# Altium PCB SV06.PcbDoc (part 3 of 3)
Units mil, origin at the board's own origin, x right, y up, seen from the top; angles counter-clockwise.
Board outline 3960.63 x 2763.78 mil, 2 copper layers (Top, Bottom), stack 12.7 mil thick; 211 components, 173 nets, 726 pads, 644 vias.
Unrouted connection lines stored in the file: 411.
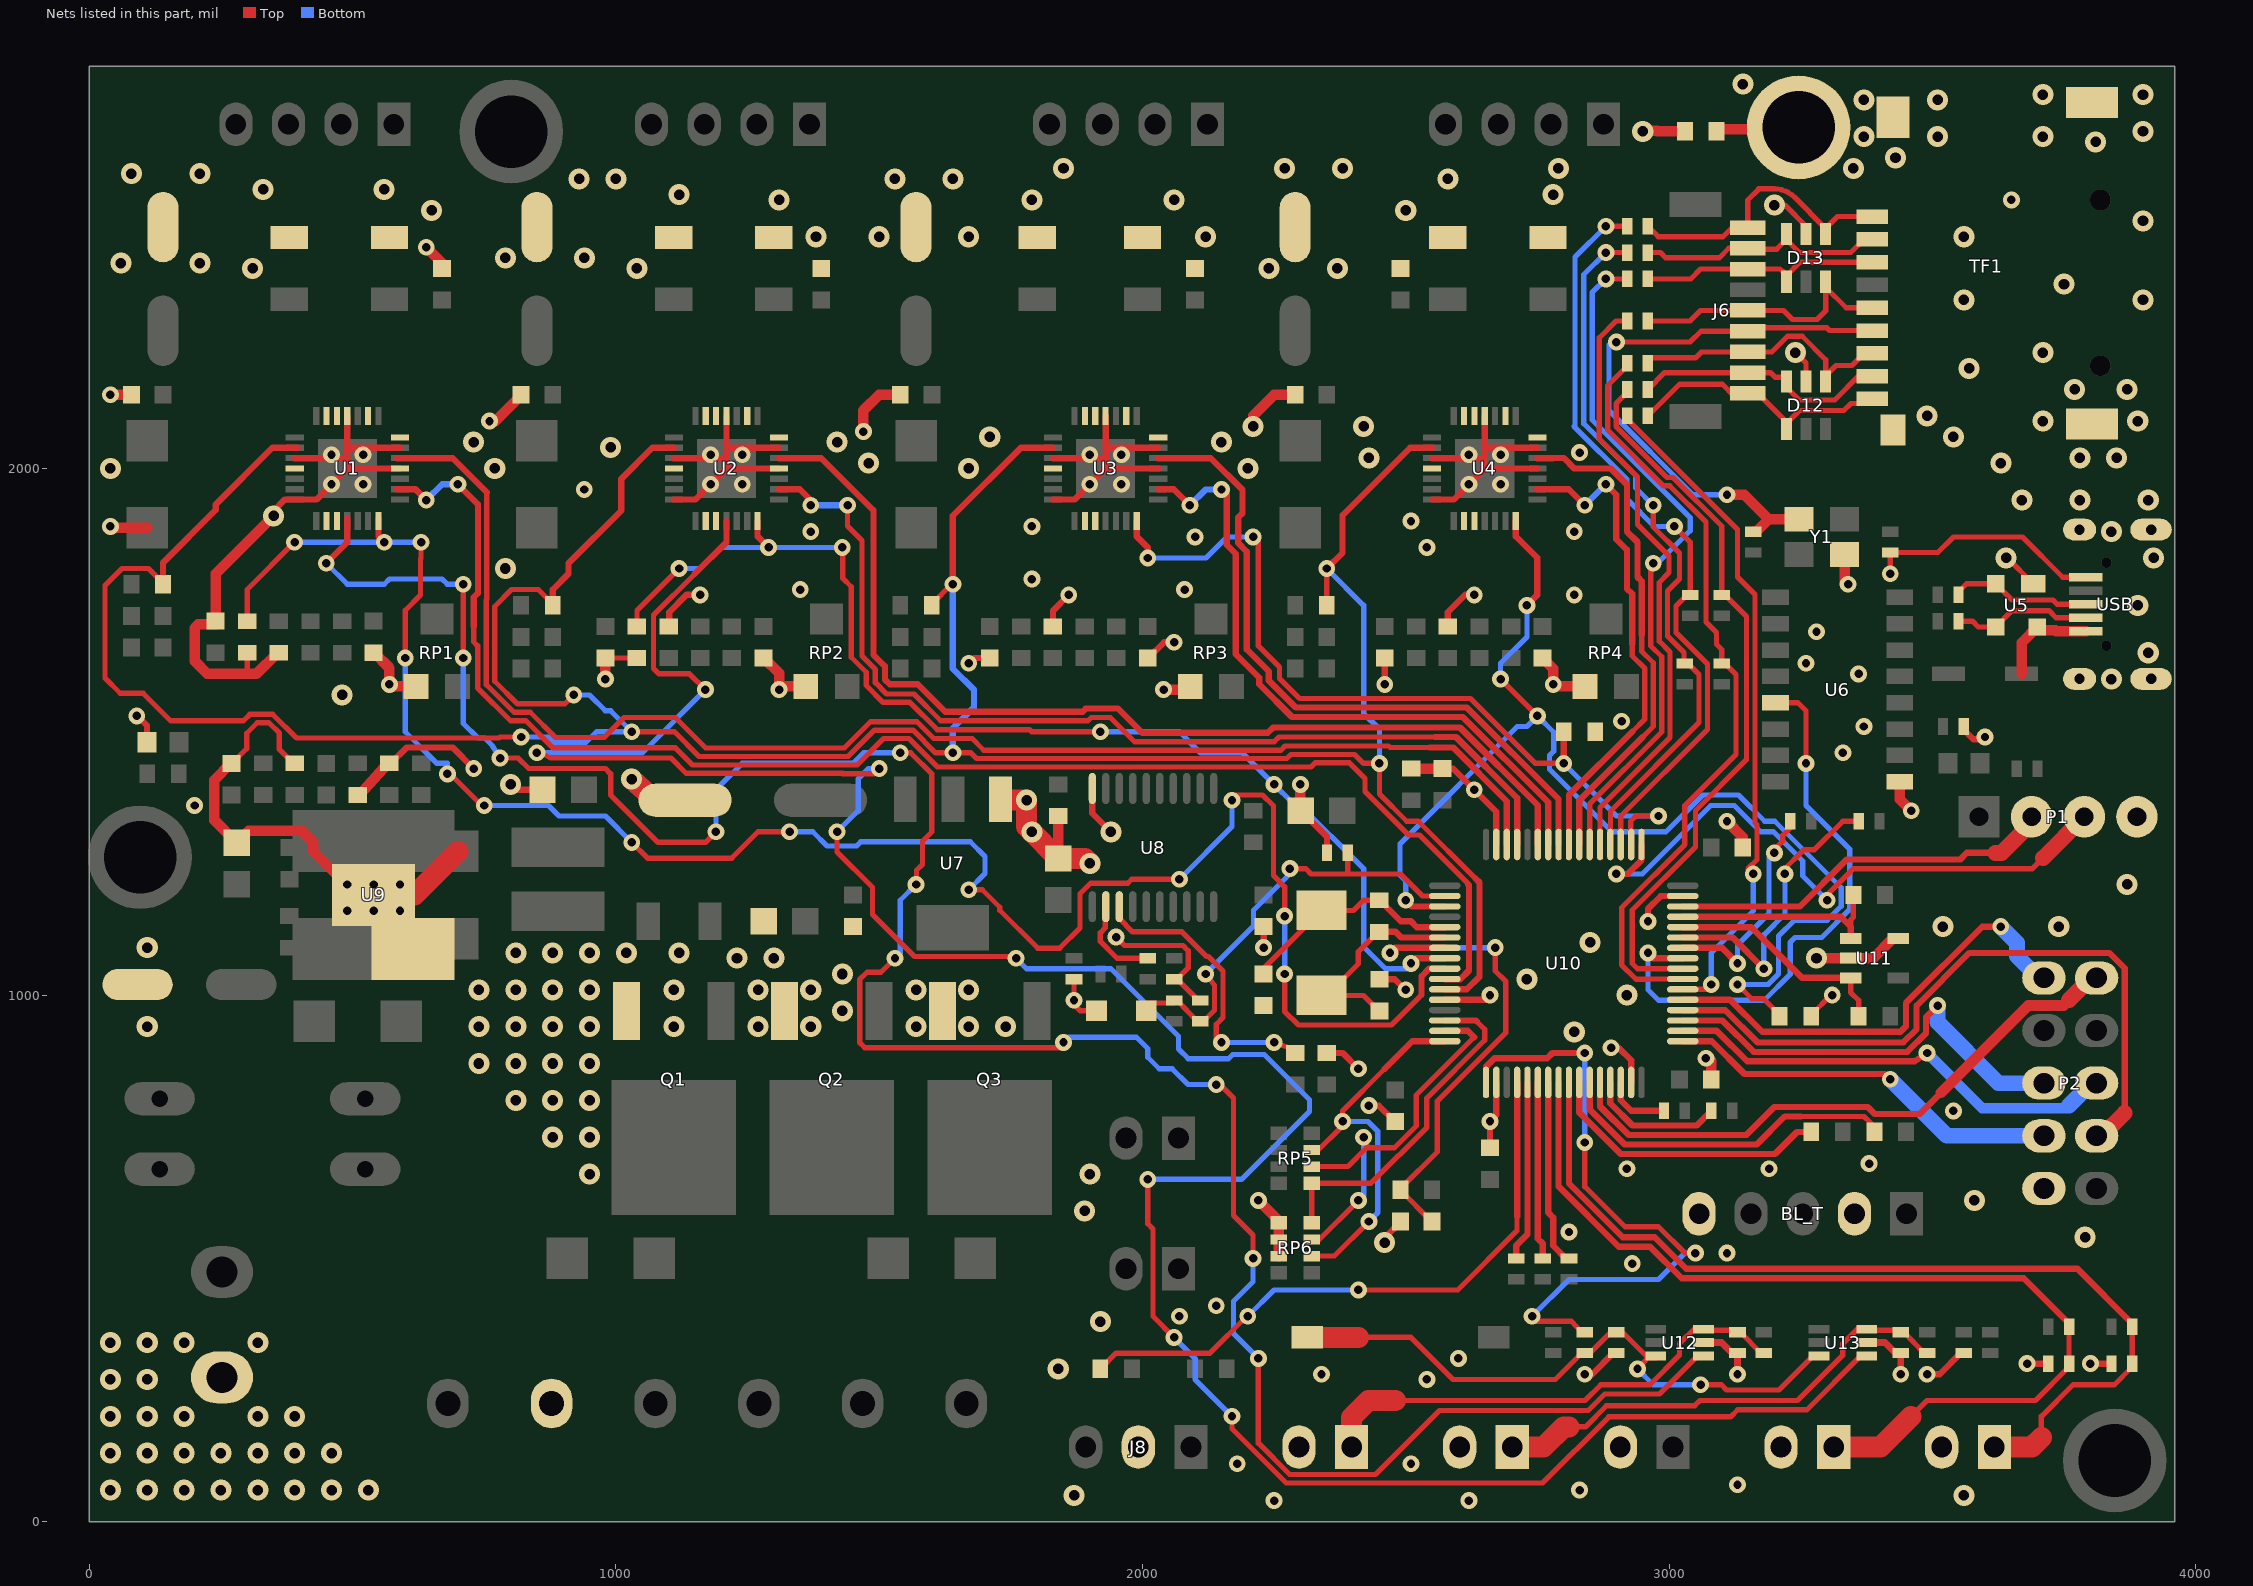
[diagram p3: the nets of this part, all layers, seen from the top]

## Via types
v1: diameter 32, hole 16, Top to Bottom, 363 vias
v2: diameter 40, hole 20, Top to Bottom, 281 vias

## Nets (pads, with @x,y where several pads share a name; then routed paths per layer and width w, separated by ;. In a path a pad name is that pad's centre, name@x,y a point inside that pad or via, vN(x,y) a via of type N, cw(c..) or ccw(c..) an arc to the next point about the centre after c; other vN are vias at no path point) (continued)
GND: BL_T.2 BL_T.5 C1.1 C2.1 C3.2 C4.2 C5.2 C6.2 C7.2 C8.2 C9.2 C10.2 C11.1 C12.1 C13.1 C14.2 C15.2 C21.2 C22.2 C24.2 C25.2 C27.2 C28.2 C30.2 C31.2 C32.2 C34.2 C36.1 C38.2 C39.1 C40.1 C41.1 C42.2 C44.2 C46.2 C47.2 C48.2 C49.2 C50.2 C51.1 C52.1 C53.1 C54.1 C55.1 C56.1 C57.1 C58.2 C59.2 C60.2 D6.1 D14.2 FAN.2 J6.6 J8.2 J9.2 J10.2 J11.2 P1.4 P2.9 P3.1 Q1.3 Q2.3 Q3.3 R9.1 R10.2 R14.2 R18.2 R22.2 R28.1 R29.1 R30.1 R32.2 R33.2 R40.2 R42.2 R46.2 R53.2 R55.2 R60.2 R61.2 R68.1 R70.2 RP1.1 RP2.1 RP3.1 RP4.1 RP6.1 RP6.2 RP6.3 S1.1 S2.1 S3.1 S4.1 S5.1 S6.1 S7.1 S8.1 TB.2 TF1.6 TH.2 U1.3 U1.7 U1.18 U1.20 U1.25 U2.3 U2.7 U2.18 U2.20 U2.25 U3.3 U3.7 U3.18 U3.20 U3.25 U4.3 U4.7 U4.18 U4.20 U4.25 U6.1 U7.1 U8.10 U9.0 U9.4 U10.12 U10.18 U10.31 U10.47 U10.63 U11.2 U11.5 U12.2 U13.2 USB.1 Y1.2 Y1.4 | length 10524.1
  Top w10: C32.2@270,1440 271,1440 298.89,1467.89 298.89,1497.07 318.82,1517 341.18,1517 360.86,1497.32 360.86,1466.64 387.5,1440 R28.1@390,1440 ; 300,1610 R53.2@300,1650 ; C24.2@980,1640 R55.2@1040,1640 ; R40.2@1870,1030.32 v1(1870,990) 1870,982.07 1882.07,970 1910,970 D14.2@1912.76,970 ; v1(1950,1110) 1965.89,1094.11 2076.73,1094.11 2086.75,1084.09 2086.75,1051.16 R42.2@2065.91,1030.32 ; R42.2@2060,1030.32 R42.2@2065.91,1030.32 ; R68.1@2110,989.69 2106.54,989.69 R42.2@2065.91,1030.32 ; v1(2900,2240) 3040,2240 3060.63,2260.63 3158.07,2260.63 J6.6@3149.51,2260.64 3138.9,2261.81 3143.62,2266.53 3144.09,2267 3299.79,2267 3304.98,2261.81 TF1.6@3385.83,2261.81 ; v2@2949.95,2641.2 2950,2641.15 v2(2950,2640) ; R61.2@3270,960 3270,962.5 3307.5,1000 v1(3310,1000) ; v1(3420,1800) v1@3420,1809.73 ; v1@3420,1809.74 C13.1@3420,1840.31 3510.31,1840.31 3540,1870 3671.02,1870 3747.72,1793.31 USB.1@3791.34,1793.31
  Top w12: v1(90,1530) 90.98,1530 109.69,1511.29 D6.1@109.69,1480 ; v2(350,1910) 350,1920 371.03,1941.03 395.51,1941.03 395.51,1940.94 ; 390.1,1940.94 395.51,1940.94 ; 390.1,2019.68 490,2019.68 ; v1@460,1974 v1@461.6,1972.4 ; U1.18@490,2099.9 490,2039.37 ; R30.1@570,1440 572.5,1440 602.5,1470 690,1470 v1(730,1430) ; 589.9,2000 490,2000 ; 589.9,2039.37 490,2039.37 ; v2(800,1400) 810,1390 C46.2@860.63,1390 ; R14.2@1100,1700 1101.04,1700 1101.04,1727 1134.04,1760 v1(1160,1760) ; 1110.1,1940.94 1150.94,1940.94 v1(1180,1970) 1210,2000 ; 1110.1,2019.68 1210,2019.68 ; U2.18@1210,2099.9 1210,2039.37 ; 1309.9,2000 1210,2000 ; 1309.9,2039.37 1210,2039.37 ; v1(1670,1630) 1680,1640 C27.2@1710,1640 ; R18.2@1830,1700 1830,1730 v1(1860,1760) ; 1830.1,1940.94 1870.94,1940.94 v1(1900,1970) 1930,2000 ; 1830.1,2019.68 1930,2019.68 ; U8.10@1904.84,1392.2 1904.84,1345.16 v2(1940,1310) ; U3.18@1930,2099.9 1930,2039.37 ; C28.2@2010,1640 2011,1640 2041,1670 v1(2060,1670) ; 2029.9,2000 1930,2000 ; 2029.9,2039.37 1930,2039.37 ; v1(2230,1090) C47.2@2230,1130 ; C40.1@2300.63,1350 2350.32,1300.31 C34.2@2350.32,1270 ; R46.2@2350,890 2380,890 v1(2410,860) ; v1(2430,790) 2449,790 2479,760 C52.1@2480,760 ; C50.2@2450,1030 2479,1030 2500,1009 v1(2500,1010) ; v2(2460,530) 2460,539 2490,569 C54.1@2490,570 ; v1(2460,1590) C30.2@2460,1640 ; 2550.1,1940.94 2590.94,1940.94 v1(2620,1970) 2650,2000 ; 2550.1,2019.68 2650,2019.68 ; C36.1@2570,1430 2590,1430 v1(2630,1390) 2672.05,1347.95 U10.63@2672.05,1285.91 ; U10.12@2574.09,991.1 2651.1,991.1 v1(2660,1000) ; R22.2@2580,1700 2580,1727 2613,1760 v1(2630,1760) ; U4.18@2650,2099.9 2650,2039.37 ; C53.1@2660,710 v1(2660,760) 2672.05,772.05 U10.18@2672.05,834.09 ; 2749.9,2000 2650,2000 ; 2749.9,2039.37 2650,2039.37 ; v1(2840,280) 2853.78,280 2894.09,320.31 R9.1@2900,320.31 ; v1(2890,900) 2904.05,900 2927.95,876.09 U10.31@2927.95,834.09 ; v1(2960,1140) 2960,1164.05 2983.91,1187.95 U10.47@3025.91,1187.95 ; v1(3440,280) C56.1@3440,320.31 ; v1(3490,280) 3513.78,280 3554.1,320.31 C57.1@3560,320.31 ; C15.2@3559.68,1510 3559.68,1504.09 3578.01,1485.76 3595.76,1485.76 v1(3600,1490) ; v1(3680,300) C58.2@3720.32,300 ; v1(3800,300) C59.2@3840.32,300 ; 395.51,1940.94 431.45,1940.94 490.15,1999.64 490,2000 ; 490,2000 490,2019.68 ; 490,2019.68 490,2039.37 ; 1210,2000 1210,2019.68 ; 1210,2019.68 1210,2039.37 ; 1930,2000 1930,2019.68 ; 1930,2019.68 1930,2039.37 ; 2650,2000 2650,2019.68 ; 2650,2019.68 2650,2039.37
  Top w13: U12.2@3065.27,340 3100,340 3119.69,320.31 3120.31,320.31 C55.1@3130,320.31 3130,290 v1(3130,280) ; U13.2@3375.27,340 3410,340 3429.69,320.31 C56.1@3440,320.31
  Top w20: v1(40,1890) 42.68,1887.32 110,1887.32 ; v1(40,2140) C9.2@80,2140 ; C32.2@270,1440 269,1440 237,1408 237,1332.37 C42.2@280,1289.37 302.63,1312 403.63,1312 425.09,1290.53 425.09,1273.25 489.17,1209.17 508.35,1190 U9.0@540,1190 580,1150 615,1115 U9.4@615,1087.64 ; v2(350,1910) 240,1800 C21.2@240,1710 240,1704 207,1704 200,1697 200,1634.37 224.37,1610 300,1610 317.5,1610 357.5,1650 R10.2@360,1650 ; R29.1@510,1380 513,1380 567,1440 R30.1@570,1440 ; C22.2@540,1650 541,1650 570,1621 v1(570,1590) 572.2,1590 576.17,1586.03 RP1.1@620.63,1586.03 ; v1(640,2420) 670,2390 C1.1@670,2380 ; v1(760,2090) 771,2090 820,2139 C10.2@820,2140 ; v1(980,1600) C24.2@980,1640 ; C25.2@1280,1640 1281,1640 1310,1611 v1@1310,1582.2 ; v1(1310,1580) v1@1310,1582.2 ; RP2.1@1360.63,1586.03 1313.83,1586.03 v1@1310,1582.2 ; v1(1470,2070) 1470,2110 1500,2140 C11.1@1540,2140 ; U7.1@1730.55,1372 1778,1372 v2(1780,1370) ; C44.2@1840,1259.37 R32.2@1840,1340 ; v1(2040,1580) 2090.63,1580 RP3.1@2090.63,1586.03 ; v2(2210,2080) 2210,2100 2250,2140 C12.1@2290,2140 ; v1(2220,610) 2258.51,571.49 RP6.1@2258.51,567.24 RP6.2@2258.5,535.75 RP6.3@2258.5,504.25 ; v1(2300,1400) 2300,1350 C40.1@2300.63,1350 ; R33.2@2510,1430 C36.1@2570,1430 ; C31.2@2760,1640 2780,1620 v1@2780,1590.27 ; v1(2780,1590) v1@2780,1590.27 ; RP4.1@2840.63,1586.03 2786.17,1586.03 2780.96,1591.24 v1@2780,1590.27 ; v2@2949.95,2641.2 2976.37,2641.2 2977.57,2640 R70.2@3030,2640 ; v1(3070,880) 3075,880 3080,875 C51.1@3080,840 ; v1(3110,1330) 3140,1300 C41.1@3140,1280 ; v1(3110,1950) 3143.16,1950 3189.69,1903.47 ; C14.2@3160,1879.68 3165.91,1879.68 3189.69,1903.47 ; Y1.4@3246.69,1903.47 3189.69,1903.47 ; v2(3280,1070) U11.2@3344.82,1070 3387.68,1070 3425.08,1107.4 U11.5@3435.18,1107.4 ; Y1.2@3333.31,1836.53 3333.31,1786.69 v1(3340,1780) ; U6.1@3438.11,1405 3438.11,1371.89 v1(3460,1350)
  Top w40: U9.0@540,1190 617.32,1190 700,1272.68 ; v2(1030,1410) 1074.28,1370 C60.2@1131.37,1370 ; U7.1@1730.55,1372 1730.55,1370 v2(1780,1370) 1780,1320 v2(1790,1310) 1835,1264.37 1835,1259.37 C44.2@1840,1259.37 1891,1259.37 1900,1250.37 v2(1900,1250)
  Bottom w10: v1(2900,2240) 2891.1,2240 2886,2234.9 2886,2110 3046,1950 v1(3110,1950)
  other v1: 2250,40 2620,40 2830,60 3130,70 2180,110 2510,110 2540,270 2340,280 2600,310 2070,390 2140,410 2930,490 3110,510 2810,550 2920,670 3190,670 3380,680 3540,780 490,1160 540,1160 590,1160 490,1210 540,1210 590,1210 200,1360 3330,1460 3370,1510 2910,1520 3360,1610 3260,1630 3280,1690 2820,1760 1350,1770 2080,1770 1790,1790 2540,1850 2100,1870 1370,1880 2820,1880 1790,1890 2510,1900 940,1960 460,1970 520,1970 1240,1970 1960,1970 2680,1970 460,2026 520,2026 1180,2026 1240,2026 1900,2026 1960,2026 2620,2026 2680,2026 2830,2030
  other v2: 1870,50 3560,50 40,60 110,60 180,60 250,60 320,60 390,60 460,60 530,60 40,130 110,130 180,130 250,130 320,130 390,130 460,130 40,200 110,200 180,200 320,200 390,200 40,270 110,270 1840,290 40,340 110,340 180,340 320,340 1920,380 3790,540 1890,590 3580,610 950,660 1900,660 880,730 950,730 810,800 880,800 950,800 740,870 810,870 880,870 950,870 2820,930 110,940 740,940 810,940 880,940 950,940 1110,940 1270,940 1370,940 1570,940 1670,940 1740,940 1430,970 2920,1000 740,1010 810,1010 880,1010 950,1010 1110,1010 1270,1010 1370,1010 1570,1010 1670,1010 2730,1030 1430,1040 1230,1070 1300,1070 810,1080 880,1080 950,1080 1020,1080 1120,1080 110,1090 2850,1100 3520,1130 3740,1130 3870,1210 480,1570 790,1810 40,2000 770,2000 1670,2000 2200,2000 1480,2010 2430,2020 990,2040 730,2050 1420,2050 2150,2050 1710,2060 2420,2080 310,2380 1040,2380 2240,2380 2370,2380 60,2390 210,2390 790,2400 940,2400 1380,2440 1500,2440 1670,2440 2120,2440 650,2490 2500,2490 1310,2510 1790,2510 2060,2510 1120,2520 2780,2520 330,2530 560,2530 930,2550 1000,2550 1530,2550 1640,2550 2580,2550 80,2560 210,2560 1850,2570 2270,2570 2380,2570 2790,2570
HEATER1_5V: R43.1 U8.12 | length 174.4
  Top w10: U8.12@1930.43,1167.8 1929.08,1167.8 1929.08,1127.17 1920,1118.09 1920,1101.82 1952.13,1069.69 R43.1@2010,1069.69
K_FAN_5V: R45.1 U8.13 | length 563.1
  Top w10: U8.13@1956.02,1167.8 1956.02,1145.16 1981.18,1120 2074.81,1120 2121.81,1073 2125.18,1073 2152.75,1045.44 2152.75,957.14 2140,944.39 2140,910 v1(2150,910) ; v1(2250,910) 2277.5,900 2290,900 R45.1@2290,890
  Bottom w10: v1(2150,910) v1(2250,910)
OSC_IN: C49.1 R39.2 U10.5 Y2.2 | length 444
  Top w10: C49.1@2230,1040 2230,1050.71 Y2.2@2340,1160.71 ; R39.2@2450,1180 2420,1180 2400.71,1160.71 Y2.2@2340.62,1160.71 ; Y2.2@2340,1160.71 2340,1160 2340.35,1160.4 Y2.2@2340.62,1160.71 ; Y2.2@2340,1160.71 2344.69,1165.4 Y2.2@2340.62,1160.71 ; Y2.2@2340,1160.71 Y2.2@2340.62,1160.71
  Top w12: R39.2@2450,1180 2450.4,1180 2490.4,1140 2510,1140 2521.1,1128.9 U10.5@2574.09,1128.9
OSC_OUT: C50.1 R39.1 U10.6 Y2.1 | length 414.4
  Top w10: Y2.1@2340,999.29 Y2.1@2349.84,999.29 ; C50.1@2450,970 2449,970 2419.71,999.29 Y2.1@2349.84,999.29 ; R39.1@2450,1120 2447.5,1120 2410,1082.5 2410,1059.45 Y2.1@2349.84,999.29
  Top w12: R39.1@2450,1120 2480.4,1120 2491.19,1109.21 U10.6@2574.09,1109.21
PA0_K_FAN1: RP5.1 RP6.8 U10.14 | length 652.5
  Top w10: 2321.49,605 RP5.1@2321.49,642.76 2433.94,642.76 2540,748.82 2540,804.29 2650,914.29 2650,934.87 2634.87,950 ; RP6.8@2321.5,567.24 2321.5,604.99
  Top w12: U10.14@2574.09,951.73 2633.14,951.73 2634.87,950
PA1_HEATER1: RP5.2 RP6.7 U10.15 | length 776
  Top w10: RP6.7@2321.5,535.75 2321.5,532.38 2332.38,532.38 v1(2410,610) ; RP5.2@2321.5,674.25 2390,674.25 2425.75,710 ; v1(2420,730) 2425.75,724.25 2425.75,710 ; 2630,920 2520,810 2520,751.44 2478.56,710 2425.75,710
  Top w12: U10.15@2574.09,932.05 2617.95,932.05 2630,920
  Bottom w10: v1(2410,610) 2420,620 v1(2420,730)
PA2_BED: RP5.3 RP6.6 U10.16 | length 748.3
  Top w10: RP6.6@2321.5,504.25 2364.25,504.25 v1(2430,570) ; RP5.3@2321.5,705.75 2321.5,702.38 2330.77,702.38 2380,751.61 v1(2380,760) 2380,780 2460,860
  Top w12: 2460,860 2512.36,912.36 U10.16@2574.09,912.36
  Bottom w10: v1(2380,760) 2428.18,760 2447,741.18 2447,587 v1(2430,570)
PA3_NONE_LMT: R62.2 U10.17 | length 1222.3
  Top w10: v1(2740,390) 2740.52,380.52 2814.77,380.52 2833.63,359.68 R62.2@2840,359.68 ; v1(2840,720) 2840,636.16 2916.16,560 2980,560 3030,510 v1(3050,510)
  Top w12: U10.17@2652.36,834.09 2652.36,863.87 2668.5,880 2768.63,880 2778.63,890 v1(2840,890)
  Bottom w10: v1(2740,390) 2810,460 2980,460 3030,510 v1(3050,510) ; v1(2840,720) v1(2840,890)
PA4_PLA_DET: R58.1 U10.20 | length 1182.4
  Top w10: R58.1@1920,290 1950,320 2128.18,320 2199.09,390.91 v1(2200,390) ; v1(2410,440) 2598.79,440 2711.42,552.63 2711.42,580
  Top w12: 2711.42,580 U10.20@2711.42,834.09
  Bottom w10: v1(2200,390) 2250,440 v1(2410,440)
PA5_LIMIT_X: R13.2 U10.21 | length 343.2
  Top w12: R13.2@2710,499.68 2710,524.35 2731.1,545.45 U10.21@2731.1,834.09
PA6_LIMIT_Y: R51.2 U10.22 | length 338.2
  Top w12: U10.22@2750.79,834.09 2750.79,537.45 2760,528.23 R51.2@2760,499.68
PA7_LIMIT_Z: R64.1 U10.23 | length 354.2
  Top w12: U10.23@2770.47,834.09 2770.47,586.98 2780,577.45 2780,523.78 2804.09,499.69 R64.1@2810,499.69
PA8_DTR: U6.13 U10.41 | length 1114.9
  Top w10: U6.13@3201.89,1555 3245,1555 3260,1540 v1(3260,1440)
  Top w12: v1(2960,1080) 2970.16,1069.84 U10.41@3025.91,1069.84
  Bottom w10: v1(2960,1080) 2960,1010 2980,990 3180.81,990 3230,1039.19 3230,1100 3239.19,1109.19 3290,1109.19 3343,1162.19 3343,1277 3260,1360 v1(3260,1440)
PA9_MCU_USART_TX_3V3: R34.2 U10.42 | length 435
  Top w10: v1(3200,1270) 3196.8,1273.2 3215.9,1292.29 3215.9,1303.28 3233.52,1320.9 3233.52,1330 R34.2@3230.32,1330
  Top w12: U10.42@3025.91,1089.53 3100.47,1089.53 v1(3130,1060)
  Bottom w10: v1(3130,1060) 3130,1094.8 3190,1154.8 3190,1260 v1(3200,1270)
PA10_MCU_USART_RX_3V3: R35.2 U10.43 | length 566.9
  Top w10: v1(3220,1230) 3215,1235 3256.17,1276.17 3276.17,1276.17 3330,1330 R35.2@3360.32,1330
  Top w12: U10.43@3025.91,1109.21 3120.79,1109.21 v1(3180,1050)
  Bottom w10: v1(3180,1050) 3180,1114.32 3220,1154.32 v1(3220,1230)
PA11_I2C_SDA: R44.2 U10.44 U11.3 | length 437.7
  Top w10: U11.3@3344.82,1032.6 3344.82,1005.18 3360,990 R44.2@3360,960
  Top w12: U10.44@3025.91,1128.9 3156.1,1128.9 3252.4,1032.6 U11.3@3344.82,1032.6
PA12_I2C_SCL: R37.2 U10.45 U11.1 | length 411.4
  Top w10: 3344.82,1129.88 3344.82,1142.6 3350,1147.78 R37.2@3350,1190
  Top w12: U10.45@3025.91,1148.58 3326.12,1148.58 3344.82,1129.88 U11.1@3344.82,1107.4
PB0_BL_TOUCH_IN: R47.1 U10.26 | length 547.5
  Top w12: U10.26@2829.53,834.09 2829.53,776.92 2908.19,698.25 3201.25,698.25 3243,740 R47.1@3270,740
PB1_BL_TOUCH_OUT: R48.1 U10.27 | length 659.8
  Top w10: 3250,769.5 3370.5,769.5 3382.48,757.52 3390,749.72 R48.1@3390,740
  Top w12: U10.27@2849.21,834.09 2849.21,782.69 2915.65,716.25 3166.78,716.25 3220.03,769.5 3250,769.5
PB2/BOOT1: P2.2 U10.28 | length 1207.6
  Top w12: U10.28@2868.9,834.09 2868.9,788.46 2923.1,734.25 3146.36,734.25 3199.6,787.5 3377.24,787.5 3390.74,774 3476.12,774 3516.17,814.04 ; 3687.78,980 3749.29,980 3749.46,980.17
  Top w20: 3516.17,814.04 3682.29,980.17 3749.46,980.17 3759.29,990
  Top w30: 3759.29,990 3801.97,1032.68 P2.2@3811.81,1032.68
PB3_E0_DIR_3V3: U4.19 U10.55 | length 953.7
  Top w10: 2948.25,1684.22 2948.25,1652.68 2970,1630.94 2970,1510 2950,1490
  Top w12: 2749.9,2019.68 2779.68,2019.68 2780,2020 2800.2,2020 2820.2,2000 2889.6,2000 2920,1969.6 2920,1880.38 2940,1860.38 2940,1793.85 2948.25,1785.59 2948.25,1684.22 ; U10.55@2829.53,1285.91 2829.53,1369.53 2950,1490
PB4_E0_STEP_3V3: U4.16 U10.56 | length 933.8
  Top w10: 2930,1500 2953.99,1523.99 2953.99,1620.21 2930,1644.2 2930,1667.2
  Top w12: 2749.9,1960.63 2809.37,1960.63 v1(2840,1930) ; U10.56@2809.84,1285.91 2809.84,1379.84 2930,1500 ; v1(2880,1970) 2900,1950 2900,1865.49 2920,1845.49 2920,1771.84 2930,1761.84 2930,1667.2
  Bottom w12: v1(2840,1930) v1(2880,1970)
PB5_Z_DIR_3V3: U3.19 U10.57 | length 1303.9
  Top w12: 2029.9,2019.68 2129.91,2019.68 2190,1959.6 2190,1915 2182,1907 2182,1858.4 2198.25,1842.16 2198.25,1656.33 2240,1614.57 2240,1597.4 2291.4,1546 2615.82,1546 2790.16,1371.67 U10.57@2790.16,1285.91
PB6_Z_STEP_3V3: U3.16 U10.58 | length 1266.4
  Top w12: 2029.9,1960.63 2059.37,1960.63 v1(2090,1930) ; v1(2150,1960) 2160,1950 2160,1854.95 2176.87,1838.08 2176.87,1647.49 2222,1602.36 2222,1589.95 2283.95,1528 2608.37,1528 2770.47,1365.9 U10.58@2770.47,1285.91
  Bottom w12: v1(2090,1930) 2120,1960 v1(2150,1960)
PB7_Y_DIR_3V3: U2.19 U10.59 | length 1977
  Top w12: 1309.9,2019.68 1389.91,2019.68 1489.1,1920.5 1489.1,1646.27 1510.88,1624.48 1510.88,1599.15 1520.08,1589.95 1573.46,1589.95 1625.4,1538 1886.44,1538 1892.44,1544 1953.65,1544 1999.65,1498 2238.16,1498 2248.16,1508 2602.91,1508 2750.79,1360.12 U10.59@2750.79,1285.91
PB8_Y_STEP_3V3: U2.16 U10.61 | length 1921.3
  Top w10: v1(1440,1930) 1440,1890.59 1467.19,1863.4 1467.19,1643.96 1492.77,1618.38 1492.77,1593.22 1514.1,1571.89 1566.13,1571.89 1617.02,1521 1896.67,1521 1902.67,1527 1938.9,1527 1984.9,1481 2250.11,1481 2259.11,1490 2555.63,1490
  Top w12: 1309.9,1960.63 1349.13,1960.63 1370,1939.76 v1(1370,1930) ; 2555.63,1490 2595.46,1490 2711.42,1374.04 U10.61@2711.42,1285.91
  Bottom w12: v1(1370,1930) 1430,1930 1435,1935 v1(1440,1930)
PB9_X_DIR_3V3: U1.19 U10.62 | length 2754.6
  Top w10: 755,1955 755,1750.95 754,1749.95 754,1589.36 806.36,1537 837.38,1537 885.38,1489 977.67,1489 1015.67,1527 1112.75,1527 1170.75,1469 1433.67,1469 1483.67,1519 1571.51,1519 1603.51,1487 1676.67,1487 1698.67,1465 2262.74,1465 2270.74,1473 2467.41,1473 2470.41,1470 2545.46,1470
  Top w12: 584.49,2019.68 690.32,2019.68 755,1955 ; 2545.46,1470 2590,1470 2691.73,1368.27 U10.62@2691.73,1285.91
PB10_I2C2_SCL/USART3_TX: R17.1 U10.29 | length 260.5
  Top w12: U10.29@2888.58,834.09 2888.58,794.23 2930.56,752.25 3052.25,752.25 3080,780 R17.1@3080.31,780
PB11_I2C2_SDA/USART3_RX: R65.2 U10.30 | length 124.4
  Top w12: U10.30@2908.27,834.09 2908.27,800 2928.27,780 R65.2@2990.32,780
PB12_SPI2_NSS/I2S2_WS/: P2.7 U10.33 | length 760.3
  Top w12: U10.33@3025.91,912.36 3080.82,912.36 3143.18,850 3410,850 v1(3420,840)
  Bottom w30: v1(3420,840) 3527.32,732.68 P2.7@3711.81,732.68
PB13_SPI2_SCK/I2S2_CK: P2.6 U10.34 | length 878
  Top w12: U10.34@3025.91,932.05 3090.17,932.05 3148.22,874 3466.4,874 v1(3490,890)
  Bottom w20: v1(3490,890) 3594.82,785.18 3754.47,785.18 3759.29,790
  Bottom w30: 3759.29,790 3801.97,832.68 P2.6@3811.81,832.68
PB14_SPI2_MISO/TIM1_CH2N: P2.5 U10.35 | length 844.5
  Top w12: U10.35@3025.91,951.73 3100.86,951.73 3160.59,892 3452.38,892 3488,927.62 3488,958 v1(3510,980)
  Bottom w30: v1(3510,980) 3510,948.35 3625.67,832.68 P2.5@3711.81,832.68
PB15_SPI2_MOSI/I2S2_SD: P2.8 U10.36 | length 1319.2
  Top w12: U10.36@3025.91,971.42 3106.63,971.42 3168.05,910 3444.93,910 3470,935.07 3470,979.6 3570.4,1080 3835.84,1080 3865.15,1050.69 3865.15,776.17
  Top w30: P2.8@3811.81,732.68 3821.65,732.68 3865.15,776.17
PC2_X_STEP_3V3: U1.16 U10.10 | length 2861.2
  Top w10: 730,1700 730,1670.59 737.5,1663.09 737.5,1583.23 799.73,1521 829.37,1521 880.87,1469.5 1113.28,1469.5 1145.78,1437 1458.28,1437 1508.28,1487 1556.45,1487 1610.45,1433 2319.85,1433 2327.85,1441 2392.84,1441 2422.5,1411.34 2422.5,1386.82 2505.32,1304 2525.77,1304 2618.89,1210.88 2618.89,1209.47
  Top w12: 584.49,1960.63 619.37,1960.63 v1(640,1940) ; v1(700,1970) 738,1932 738,1763.26 730,1755.26 730,1700 ; U10.10@2574.09,1030.47 2574.57,1030 2603.39,1030 2620,1046.61 2620,1208.36 2618.89,1209.47
  Bottom w12: v1(640,1940) 670,1970 v1(700,1970)
PC3_X_Y_Z_E_EN: R5.1 R6.1 R7.1 R8.1 U1.2 U2.2 U3.2 U4.2 U10.11 | length 6455.8
  Top w10: R5.1@140,1780 140,1782.5 112.5,1810 61.94,1810 30,1778.06 30,1601.82 58.82,1573 102.32,1573 154.32,1521 292.88,1521 304.88,1533 348.48,1533 393.48,1488 778,1488 780,1490 v1(820,1490) ; R6.1@880,1740 880,1742.5 852.5,1770 801.94,1770 770,1738.06 770,1595.99 812.99,1553 903,1553 v1(920,1570) ; v1(1030,1500) 1110.97,1500 1157.97,1453 1441.13,1453 1491.13,1503 1563.9,1503 1606.9,1460 v1(1640,1460) 1674.02,1460 1685.02,1449 2273.92,1449 2281.92,1457 2402.73,1457 2419.73,1440 v1(2450,1440) 2450,1381.94 2501.94,1330 2523.82,1330 2633.09,1220.72 ; R7.1@1600,1740 1600,1742.5 1637.5,1780 v1(1640,1780) ; R8.1@2350,1740 2350,1807.35 2352.65,1810 v1(2350,1810)
  Top w12: R5.1@140,1782.5 140,1821.24 240,1921.24 240,1931.62 347.75,2039.37 395.51,2039.37 ; R6.1@880,1742.5 880,1770 910,1800 910,1820 1010,1920 1010,1980 1069.37,2039.37 1110.1,2039.37 ; v1(1640,1780) 1640,1910 1769.37,2039.37 1830.1,2039.37 ; v1(2350,1810) 2380,1840 2380,1911.23 2508.14,2039.37 2550.1,2039.37 ; U10.11@2574.09,1010.79 2616.09,1010.79 2640,1034.69 2640,1213.82 2633.09,1220.72
  Bottom w10: v1(820,1490) 872.17,1490 882.17,1480 943.42,1480 963.42,1500 v1(1030,1500) 990,1540 980,1540 950,1570 v1(920,1570) ; v1(2350,1810) 2420,1740 2420,1535 2450,1505 v1(2450,1440)
  Bottom w12: v1(1640,1460) 1640,1506.37 1680,1546.37 1680,1580 1640,1620 v1(1640,1780)
PC4_TB: C58.1 R56.1 TB.1 U10.24 | length 1867.1
  Top w10: 3459.7,200 3489.7,230 3695.59,230 3759.69,294.1 C58.1@3759.69,300 3759.69,305.91 3759.69,364.09 R56.1@3759.69,370
  Top w12: U10.24@2790.16,834.09 2790.16,636.5 2904.66,522 2963.9,522 3023.9,462 3673.6,462 3759.69,375.91 R56.1@3759.69,370
  Top w30: TB.1@3312.6,141.73 TB.1@3319.37,141.73
  Top w40: TB.1@3319.37,141.73 3401.43,141.73 3459.7,200
PC5_TH1: C59.1 R57.1 TH.1 U10.25 | length 1802.3
  Top w10: 3707.02,160 3707.02,200 3767.02,260 3845.59,260 3879.69,294.1 C59.1@3879.69,300 3879.69,305.91 3879.69,364.09 R57.1@3879.69,370
  Top w12: U10.25@2809.84,834.09 2809.84,642.28 2912.12,540 2972.89,540 3032.89,480 3775.6,480 3879.69,375.91 R57.1@3879.69,370
  Top w40: TH.1@3617.72,141.73 3688.75,141.73 3707.02,160
PC6_I2S2_MCK/TIM8_CH1: P2.1 U10.37 | length 875.3
  Top w12: U10.37@3025.91,991.1 3115.68,991.1 3176.78,930 3439.47,930 3450,940.53 3450,985.05 3594.95,1130 v1(3630,1130)
  Bottom w30: v1(3630,1130) 3660.51,1099.49 3660.51,1074.14 3701.97,1032.68 P2.1@3711.81,1032.68
PC7_SDIO_DETECT: R69.2 U10.38 | length 1284.4
  Top w10: R69.2@2920.32,2100 2920.32,2094.09 3130,1884.41 3130,1793.7 3163,1760.7 3163,1327.19 3167,1323.19 3167,1257 3150,1240 v1(3160,1230) ; U10.38@3025.91,1010.79 3070.79,1010.79 v1(3080,1020)
  Bottom w10: v1(3080,1020) 3080,1080 3160,1160 v1(3160,1230)
PC8_SDIO_DAT0: R3.1 R74.2 U10.39 | length 1486.4
  Top w10: R74.2@2920.32,2200 2920.32,2194.09 2883.48,2157.25 2883.48,2073.07 2989.55,1967 3001.18,1967 3070,1898.18 3070,1708.68 3090,1688.68 3090,1666.17 3100,1656.17 R3.1@3100,1629.69 3105.91,1629.69 3127,1608.6 3127,1457 3030,1360 3030,1285.72 2910,1165.72 2910,1057.33 2937.33,1030 2960.88,1030 2961.36,1030.47 U10.39@3025.91,1030.47
PC9_SDIO_DAT1: R4.1 R73.2 U10.40 | length 1401.6
  Top w10: R73.2@2920.32,2150 2920.32,2144.09 2899.48,2123.25 2899.48,2079.7 2996.17,1983 3007.81,1983 3100,1890.81 R4.1@3100,1759.69 3105.91,1759.69 3147,1718.6 3147,1447 3050,1350 3050,1281.43 2930,1161.43 2930,1060 2940,1049.96 3025.91,1049.96 U10.40@3025.91,1050.16
PC10_SDIO_DAT2: R1.1 R78.2 U10.51 | length 1466.6
  Top w10: v1(2880,2460) R78.2@2920.32,2460 R78.2@2920.32,2454.09 ; U10.51@2908.27,1285.91 2908.27,1339.85 3073,1504.58 3073,1628.4 3013.25,1688.15 3013.25,1738.85 3034.09,1759.69 R1.1@3040,1759.69 3040,1860 v1(3010,1890)
  Bottom w10: v1(2880,2460) 2821.5,2401.5 2821.5,2081.96 2819.54,2080 2920,1979.54 2920,1941.82 2971.82,1890 v1(3010,1890)
PC11_SDIO_DAT3: R2.1 R77.2 U10.52 | length 1365.6
  Top w10: v1(2880,2410) R77.2@2920.32,2410 ; U10.52@2888.58,1285.91 2888.58,1349.04 3057,1517.46 3057,1608.6 3035.91,1629.69 R2.1@3030,1629.69 3028.24,1629.69 3028.24,1650.53 2997.25,1681.52 2997.25,1767.47 3020,1790.21 3020,1839.15 2970,1889.15 v1(2970,1930)
  Bottom w10: v1(2880,2410) 2838,2368 2838,2085.05 2936.63,1986.42 2936.63,1963.37 v1(2970,1930)
PC12_SDIO_CLK: R75.2 U10.53 | length 1154.6
  Top w10: U10.53@2868.9,1285.91 2868.9,1356.02 3002,1489.12 3002,1651.34 2981.25,1672.09 2981.25,1783.47 3000,1802.22 3000,1833.85 2940,1893.85 2940,1983.78 2867.48,2056.3 2867.48,2248.07 2899.41,2280 R75.2@2920.32,2280
PC13_PRDN: C34.1 D14.1 R67.1 R68.2 U10.2 | length 875.6
  Top w10: D14.1@2007.24,970 D14.1@2007.24,984.68 ; D14.1@2007.24,984.65 2060,984.96 2060,984.85 R67.1@2060,989.69 2066.1,989.69 2103.9,950.32 R68.2@2110,950.32 2115.91,950.32 2136.75,971.16 2136.75,1018.56 v1(2120,1040) ; v1(2280,1240) 2310,1240 2320,1230 2390,1230 ; C34.1@2389.69,1270 2390,1270 2390,1230 ; U10.2@2574.09,1187.95 2532.05,1187.95 2490,1230 2390,1230
  Bottom w10: v1(2120,1040) 2210.95,1130.95 2210.95,1160.95 2285,1235 v1(2280,1240)
PD2_SDIO_CMD: R76.2 U10.54 | length 1303.2
  Top w10: U10.54@2849.21,1285.91 2849.21,1362.99 2986,1499.78 2986,1642.33 2965.25,1663.08 2965.25,1815.25 v1(2970,1820) ; v1(2880,2360) R76.2@2920.32,2360
  Bottom w10: v1(2880,2360) 2854,2334 2854,2092.53 3040,1906.53 3040,1881.82 2978.18,1820 v1(2970,1820)
PD+: R71.1 U5.2 USB.3 | length 269.9
  Top w10: R71.1@3549.69,1760 3549.69,1765.91 3564.78,1781 U5.2@3620.5,1781 3651.5,1750 3728.8,1750 3736.67,1742.13 3737.87,1742.13 3740.92,1742.13 USB.3@3791.34,1742.13
PD-: R72.1 U5.3 USB.4 | length 264.6
  Top w10: R72.1@3549.69,1710 3576.27,1710 3587.27,1699 U5.3@3620.5,1699 3651.5,1730 3721.61,1730 3735.08,1716.54 USB.4@3791.34,1716.54
PDN_UART_E: R61.1 U4.14 U10.3 | length 2261.9
  Top w10: v1(2680,1600) v1(2750,1530) ; v1(3130,1020) 3156.91,993.09 3179.41,993.09 3210,962.5 R61.1@3210,960
  Top w12: v1(2500,1180) 2511.46,1168.27 U10.3@2574.09,1168.27 ; 2709.06,1900.1 2709.06,1870.94 2749.8,1830.2 2749.8,1759.8 v1(2730,1740)
  Bottom w10: v1(2500,1180) 2500,1216.58 2489,1227.58 2489,1287.18 2711.76,1509.94 2729.94,1509.94 v1(2750,1530) 2781,1499 2781,1463.17 2773,1455.17 2773,1428.82 2891.82,1310 2994.36,1310 3064.36,1380 3131.82,1380 3181.82,1330 3200.81,1330 3327,1203.81 3327,1168.82 3300.18,1142 3238.16,1142 3208,1111.84 3208,1039.82 3188.18,1020 v1(3130,1020) ; v1(2680,1600) 2680,1630 2730,1680 v1(2730,1740)
PDN_UART_X: R53.1 U1.14 U10.9 | length 3799.2
  Top w10: R53.1@300,1710 300,1770 v1(390,1860) ; v1(600,1640) 600,1730.56 629,1759.56 629,1828.39 630,1829.39 v1(630,1860) ; v1(680,1420) 682.5,1422.5 747.5,1357.5 v1(750,1360) ; v1(1030,1290) 1060,1260 1220,1260 1270,1310 v1(1330,1310) ; v1(1670,1200) 1695.76,1200 1729,1166.76 1729,1161.02 1801.02,1089 1842.84,1089 1881.48,1127.64 1881.48,1192.37 1901.32,1212.21 1971.85,1212.21 1979.64,1220 v1(2070,1220) ; v1(2170,1370) 2180,1380 2228.06,1380 2248.63,1359.43 2248.63,1226.87 2270,1205.5 v1(2270,1150) ; v1(2270,1040) 2270,969.09 2296.09,943 2473,943 2530,1000
  Top w12: 549.06,1905.51 549.06,1870.87 v1(560,1860) v1(560,1860) ; 2530,1000 2530,1035.83 2544.17,1050 U10.9@2573.94,1050
  Bottom w10: v1(390,1860) v1(560,1860) v1(630,1860) ; v1(600,1640) 600,1500 660,1440 680,1440 v1(680,1420) ; v1(750,1360) 872.17,1360 892.17,1340 980,1340 v1(1030,1290) ; v1(1330,1310) 1373.84,1310 1400.84,1283 1457.17,1283 1465.17,1291 1672.84,1291 1701,1262.84 1701,1231 v1(1670,1200) v1@1675,1195 ; v1(2070,1220) 2170,1320 v1(2170,1370) ; v1(2270,1040) v1(2270,1150)
PDN_UART_Y: R55.1 U2.14 U10.8 | length 2242
  Top w10: R55.1@1040,1700 1040,1730 v1(1120,1810) ; v1(1430,1850) 1431,1850 1431,1791.28 1446.84,1775.43 1446.84,1641.52 1475.38,1612.98 1475.38,1587.98 1507.47,1555.89 1558.38,1555.89 1610.27,1504 1785.65,1504 1789.65,1500 v1(1920,1500)
  Top w12: 1269.06,1900.1 1269.06,1870.87 v1(1290,1850) v1(1290,1850) v1@1279.06,1860.94 ; v1(2510,1060) 2519.84,1069.84 U10.8@2574.09,1069.84
  Bottom w10: v1(1120,1810) 1159.41,1810 1199.41,1850 v1(1290,1850) v1(1430,1850) ; v1(1920,1500) 2070,1500 2110,1460 2190,1460 v1(2250,1400) 2283.89,1366.11 2293.89,1366.11 2420,1240 2420,1091.82 2461.82,1050 2500,1050 v1(2510,1060)
PDN_UART_Z: R60.1 U3.14 U10.50 | length 1574.5
  Top w10: v1(2210,1870) 2220,1860 2220,1663.02 2260,1623.02 2260,1601.44 2298.44,1563 2623.01,1563 2746.01,1440 v1(2800,1440) ; U10.50@2927.95,1285.91 2927.29,1285.91 2927.29,1330 2937.29,1340 v1(2980,1340)
  Top w12: 1989.06,1900.1 1989.06,1870.87 2010,1849.93 v1(2010,1830) ; v1(2800,1440) R60.1@2800,1500
  Bottom w10: v1(2010,1830) 2120.59,1830 2160.59,1870 v1(2210,1870) ; v1(2800,1440) 2900,1340 v1(2980,1340)
PGND: D12.2 D13.2 HOLE2.1 R70.1 TF1.10 TF1.11 TF1.12 TF1.13 U5.1 USB.6 USB.7 USB.8 USB.9 | length 389.9
  Top w10: v2(3200,2500) 3220,2500 3260,2460 D13.2@3260,2445.24 ; v2(3240,2220) 3260,2200 D12.2@3260,2165.24 ; v2(3640,1830) 3642.5,1830 U5.1@3691.5,1781
  Top w20: R70.1@3090,2640 3090,2644.32 3246.06,2644.32 HOLE2.1@3246.06,2647.64
  other v1: 3650,2510
  other v2: 3840,1600 3910,1650 3890,1740 3920,1830 3840,1880 3670,1940 3780,1940 3910,1940 3630,2010 3780,2020 3850,2020 3540,2060 3710,2090 3890,2090 3490,2100 3770,2150 3870,2150 3570,2190 3710,2220 3560,2320 3900,2320 3750,2350 3560,2440 3900,2470 3350,2570 3430,2590 3810,2620 3370,2630 3510,2630 3710,2630 3900,2640 3370,2700 3510,2700 3710,2710 3900,2710 3140,2730
RESET: C54.2 R49.1 U10.7 | length 948.7
  Top w10: C54.2@2550,570 2549.12,570 2549.12,570.12 2490,629.25 R49.1@2490,630 2490,632.5 2560,702.5 2560,798.61 2690,928.61 2690,1025.59 2670,1045.59 v1(2670,1090)
  Top w12: v1(2470,1080) 2479.53,1089.53 U10.7@2574.09,1089.53
  Bottom w10: v1(2470,1080) 2480,1090 v1(2670,1090)
SDIO_CLK: D13.6 J6.5 R75.1 TF1.5 | length 528.4
  Top w10: R75.1@2959.69,2280 3040,2280 3060,2300 J6.5@3158.07,2300 ; J6.5@3149.51,2300 J6.5@3158.07,2300 ; D13.6@3297.4,2354.76 D13.6@3297.4,2344.13 ; TF1.5@3385.83,2305.12 3336.42,2305.12 D13.6@3297.4,2344.13 ; J6.5@3158.07,2300 3217.25,2300 3234.26,2283 3281.18,2283 3297.4,2299.22 D13.6@3297.4,2344.13
SDIO_CMD: D13.4 J6.3 R76.1 TF1.3 | length 471.3
  Top w10: R76.1@2959.69,2360 3041.26,2360 3060,2378.74 J6.3@3158.07,2378.74 ; J6.3@3149.51,2378.74 J6.3@3158.07,2378.74 ; D13.4@3222.6,2354.76 D13.4@3222.6,2365.39 ; TF1.3@3385.83,2391.73 3248.94,2391.73 D13.4@3222.6,2365.39 ; J6.3@3158.07,2378.74 3210,2378.74 3222.6,2370 D13.4@3222.6,2365.39
SDIO_DAT0: D12.1 J6.7 R74.1 TF1.7 | length 539
  Top w10: R74.1@2959.69,2200 2959.69,2210 3050,2210 3061.26,2221.26 J6.7@3158.07,2221.26 ; J6.7@3149.51,2221.27 J6.7@3158.07,2221.26 ; D12.1@3297.4,2165.24 D12.1@3297.4,2175.87 ; TF1.7@3385.83,2218.5 3370.08,2218.5 3347.11,2195.53 3317.07,2195.53 D12.1@3297.4,2175.87 ; J6.7@3158.07,2221.26 3195.06,2221.26 3224.79,2251 3252.84,2251 3297.4,2206.44 D12.1@3297.4,2175.87
SDIO_DAT1: D12.3 J6.8 R73.1 TF1.8 | length 499.4
  Top w10: R73.1@2959.69,2150 2991.58,2181.89 J6.8@3158.07,2181.89 ; J6.8@3149.51,2181.9 J6.8@3158.07,2181.89 ; TF1.8@3385.83,2175.2 3385.83,2175.34 3360,2175.34 3314.66,2130 3247.2,2130 3222.6,2154.61 D12.3@3222.6,2165.24 3222.6,2173.46 3201.13,2173.46 3192.69,2181.89 J6.8@3158.07,2181.89
SDIO_DAT2: D13.1 J6.1 R78.1 TF1.1 | length 568.7
  Top w10: R78.1@2959.69,2460 2979.69,2440 3102.52,2440 3120,2457.48 J6.1@3149.51,2457.48 ; D13.1@3297.4,2445.24 D13.1@3297.4,2455.87 ; TF1.1@3385.83,2478.35 3319.88,2478.35 D13.1@3297.4,2455.87 ; J6.1@3149.51,2457.48 3158.07,2457.48 J6.1@3149.51,2457.48 ; J6.1@3149.51,2457.48 3149.51,2510 3170.51,2531 3200,2531 cw(c3200,2477.24) 3238.01,2515.25 D13.1@3297.4,2455.87
SDIO_DAT3: D13.3 J6.2 R77.1 TF1.2 | length 486.8
  Top w10: R77.1@2959.69,2410 2983.8,2410 2993.8,2400 3095.24,2400 3113.35,2418.11 J6.2@3158.07,2418.11 ; J6.2@3149.51,2418.11 J6.2@3158.07,2418.11 ; D13.3@3222.6,2445.24 D13.3@3222.6,2434.61 ; TF1.2@3385.83,2435.04 3370.08,2435.04 3345.04,2410 3247.2,2410 D13.3@3222.6,2434.61 ; J6.2@3158.07,2418.11 3158.07,2416.36 3204.35,2416.36 D13.3@3222.6,2434.61
SDIO_DETECT: D12.4 J6.9 R69.1 TF1.9 | length 547
  Top w10: R69.1@2959.69,2100 3019.69,2160 3101.13,2160 3123.45,2137.68 3158.07,2137.68 J6.9@3158.07,2142.52 ; J6.9@3149.51,2142.53 J6.9@3158.07,2142.52 ; TF1.9@3385.83,2132.36 3385.83,2123.58 3345.3,2123.58 3331.72,2110 3247.64,2110 D12.4@3224.19,2086.56 ; J6.9@3158.07,2142.52 3168.66,2142.52 3224.19,2086.99 D12.4@3224.19,2086.56 ; D12.4@3224.19,2086.56 3224.19,2074.76 D12.4@3222.6,2074.76 3222.6,2084.96 D12.4@3224.19,2086.56
SW_NONE_LMT: R9.2 R62.1 S9.1 U12.6 U13.6 | length 1196.7
  Top w10: 2410,350 2510,350 2590,270 2783.78,270 2834.09,320.31 R62.1@2840,320.31 2840,318.11 2848.11,318.11 2891.89,361.88 R9.2@2900,361.88 ; R9.2@2900,359.68 R9.2@2900,361.88 ; v1(2940,290) U12.6@2960.05,311.16 ; v1(3060,260) 3099.41,260 3109.41,250 3208.89,250 3273.3,314.41 U13.6@3284.72,314.41 ; R9.2@2900,361.88 2900,362.49 2908.72,362.49 U12.6@2960.05,311.16 ; U12.6@2960.05,311.16 2963.13,314.41 U12.6@2974.72,314.41 2974.72,311.16 U12.6@2960.05,311.16
  Top w40: S9.1@2312.83,350 2370,350 2410,350
  Bottom w10: v1(2940,290) 2970,260 v1(3060,260)
SWDCLK: P1.3 U10.49 | length 1193.3
  Top w10: v1(3300,1180) 3300,1190 3350,1240 3690,1240 3710,1260
  Top w12: v1(2900,1230) 2921.5,1230 2947.64,1256.13 U10.49@2947.64,1285.91
  Top w30: 3710,1260 P1.3@3788.58,1338.58
  Bottom w10: v1(2900,1230) 2949.08,1230 3079.08,1360 3123.69,1360 3173.69,1310 3198.18,1310 3253.95,1254.23 3253.95,1226.05 v1(3300,1180)
SWDIO: P1.2 U10.46 | length 745.2
  Top w12: U10.46@3025.91,1168.27 3081.64,1168.27 3081.9,1168 3248,1168 3337.5,1257.5 3552.69,1257.5 3565.19,1270 3620,1270
  Top w30: 3620,1270 3631.79,1270 3694.48,1332.69 P1.2@3688.58,1338.58
V_USB: U5.4 USB.5 | length 200.4
  Top w20: 3669.5,1610 3669.5,1669 U5.4@3699.5,1699 3699.5,1692.5 3733.52,1692.5 3735.08,1690.94 USB.5@3791.34,1690.94
X-: C55.2 J9.1 R50.1 U12.3 | length 948.7
  Top w10: 2480,230 2840.44,230 2870.44,260 2963.82,260 3020,316.18 3020,338.24 3050.6,368.84 3065.27,368.84 U12.3@3065.27,365.59 3065.27,363.21 3130,363.21 C55.2@3130,359.68 3136.1,359.68 3173.9,320.31 R50.1@3180,320.31
  Top w40: J9.1@2397.24,141.73 2397.24,198.09 2429.16,230 2480,230
X_DIAG: U1.11 U12.1 | length 4829.7
  Top w10: v1(710,1640) v1(710,1780) ; v1(780,1450) 814.41,1450 834.41,1430 980,1430 990,1420 990,1380 1080,1290 1170,1290 v1(1190,1310) ; v1(1530,1070) 1503.31,1043.31 1476.93,1043.31 1462.89,1029.28 1462.89,909.93 1472.82,900 1845.86,900 v1(1850,910) ; v1(1540,1460) 1560,1460 1600,1420 1600,1310 1582.1,1292.1 1582.1,1248.26 1570.84,1237 1570.84,1210 v1(1570,1210) ; v1(2140,830) 2147.37,830 2173,804.37 2173,581.41 2210,544.41 v1(2210,500) ; v1(2220,310) 2220,149.04 2279.64,89.39 2442.25,89.39 2563.96,211.1 2846.42,211.1 2877.87,242.55 2982,242.55 3053.86,314.41 U12.1@3065.27,314.41
  Top w12: v1(450,1820) 490,1860 490,1905.51
  Bottom w10: v1(450,1820) 490,1780 560,1780 570,1790 670,1790 680,1780 v1(710,1780) ; v1(710,1640) 710,1516.16 738.16,1488 751,1488 765.5,1473.51 780.5,1450.32 v1(780,1450) ; v1(1190,1310) 1190,1390 1240,1440 1450,1440 1470,1460 v1(1540,1460) ; v1(1530,1070) 1540,1080 1540,1180 v1(1570,1210) ; v1(1850,910) 1860,920 1988.18,920 2010,898.18 2010,881.82 2031.82,860 2056.39,860 2086.39,830 v1(2140,830) ; v1(2210,500) 2210,455.59 2173,418.59 2173,357 v1(2220,310)
Y-: C56.2 J10.1 R52.1 U13.3 | length 920.6
  Top w10: 2810,180 2840.96,180 2880.96,220 3048.62,220 3058.62,230 3243.82,230 3330,316.18 3330,338.24 3360.6,368.84 3375.27,368.84 U13.3@3375.27,365.59 3375.27,363.21 3440,363.21 C56.2@3440,359.68 3446.1,359.68 3483.9,320.31 R52.1@3490,320.31
  Top w40: J10.1@2702.36,141.73 2761.73,141.73 2800,180 2810,180
Y_DIAG: U2.11 U13.1 | length 5133.3
  Top w10: v1(850,1460) 852.18,1464 852.28,1463.94 876.37,1450 1104.59,1450 1133.59,1421 1430,1421 1431,1420 1490,1420 v1(1500,1430) ; 1150,1800 1071.5,1721.5 1071.5,1620.44 1081.94,1610 1140,1610 v1(1170,1580) ; v1(1420,1310) 1420,1271.92 1487.25,1204.67 1487.25,1152.99 1567.24,1073 v1@1762.18,1073 ; v1(1760,1070) v1@1762.18,1073 ; v1(2010,650) 2010,565.88 2020,555.88 2020,390 v1(2060,350) ; v1(2170,200) 2170,176.41 2273.01,73.39 2760,73.39 2885.64,199.04 3116.83,199.04 3130.33,212.53 3261.97,212.53 3363.86,314.41 U13.1@3375.27,314.41 ; v1@1762.18,1073 1769.62,1073 1764.76,1076.54 v1@1762.18,1073
  Top w12: 1150,1800 1210,1860 1210,1900.1
  Bottom w10: v1(850,1460) 1050,1460 v1(1170,1580) ; v1(1420,1310) 1460,1350 1460,1410 1480,1430 v1(1500,1430) ; v1(1760,1070) 1780,1050 1940,1050 2068.36,921.64 2068.36,897.8 2087.16,879 2163.48,879 2171.48,887 2231.18,887 2317,801.18 2317,778.82 2188.18,650 v1(2010,650) ; v1(2060,350) 2100,310 2100,270 v1(2170,200)
pads on no net: D1.1 D1.2 D2.1 D2.2 D3.1 D3.2 D4.1 D4.2 D7.1 D7.2 D8.1 D8.2 D9.1 D9.2 D10.1 D10.2 D11.1 D11.2 D12.6 HOLE1.1 HOLE3.1 HOLE5.1 J6.10 J6.11 RP5.4 RP5.5 RP6.4 RP6.5 TF1.14 TF1.15 U1.29 U2.29 U3.29 U4.29 U6.9 U6.10 U6.11 U6.12 U6.14 U6.15 U8.2 U8.3 U8.4 U8.5 U8.6 U8.14 U8.15 U8.16 U8.17 U8.18 U10.4 USB.2 USB.10 USB.11

## Polygon pours and split planes (outlines as drawn)
PGND on Top "Top-PGND" (solid, remove dead copper, pour order 0): 3110,2760 3110,2560 3150,2520 3150,2160 3280,2030 3520,2030 3580,1970 3580,1680 3720,1540 3950,1540 3950,2760
24V on Top "Top-24V" (solid, remove dead copper, pour order 2): 180,910 320,770 350,770 470,890 470,1040 330,1180 220,1180 180,1140
24V_IN on Top "Top-24V_IN" (solid, remove dead copper, pour order 6): 470,870 340,740 340,550 360,530 360,290 640,10 1780,10 1810,40 1810,520 1790,540 990,540 960,570 960,610 700,870
$$$24916 on Top "Top-$$$24916" (solid, remove dead copper, pour order 8): 10,400 10,850 30,870 200,870 320,750 320,550 340,530 340,440 300,400
GND on Top "Top-GND" (solid, remove dead copper, pour order 18): -840,3246.85 5580,3246.85 5580,-333.15 -840,-333.15
24V_IN on Bottom "Bottom-24V_IN" (solid, remove dead copper, pour order 4): 1780,10 1810,40 1810,520 1790,540 990,540 830,700 770,700 750,680 750,50 790,10
24V on Bottom "Bottom-24V" (solid, remove dead copper, pour order 10): 470,890 470,1040 440,1070 440,1730 320,1850 320,2310 290,2340 100,2340 90,2330 90,1790 230,1650 230,1190 180,1140 180,910 320,770 350,770
GND on Bottom "Bottom-GND" (solid, remove dead copper, pour order 12): -1700,3986.85 6510,3986.85 6510,-963.15 -1700,-963.15
GND on Bottom "Bottom-GND 1" (solid, remove dead copper, pour order 14): 470,870 340,740 340,550 360,530 360,440 310,390 0,390 0,10 840,10 960,130 960,610 700,870
24V on Bottom "Bottom-24V 1" (solid, remove dead copper, pour order 16): 2870,2280 2810,2340 100,2340 70,2310 70,2170 120,2120 2820,2120 2870,2170
$$$24916 on Bottom "Bottom-$$$24916" (solid, remove dead copper, pour order 20): 10,400 10,850 30,870 200,870 320,750 320,550 340,530 340,440 300,400
PGND on Bottom "Bottom-PGND" (solid, remove dead copper, pour order 22): 3110,2760 3110,2560 3150,2520 3150,2160 3280,2030 3520,2030 3580,1970 3580,1680 3720,1540 3950,1540 3950,2760

## Keep-outs
Keep-Out Layer:
  the board outline again, w6

## Silkscreen, mask and mechanical layers (free items; w line width, h text height)
Silkscreen Top:
  lines w6: 20,1800 20,1740 40,1720 ; 240,1480 300,1480 ; 420,1050 660,1050 710,1000 710,840 ; 480,490 550,490 ; 510,150 480,180 ; 660,1330 630,1300 ; 1480,1560 1480,1620 1470,1630 ; 1910,1090 1940,1090 1940,1075 ; 2070,860 2060,860 1990,930 ; 2150,980 2180,980 2180,960 ; 2380,880 2570,880 2590,860 2590,830 2630,790 2670,790 2700,760 2700,790 2670,760 2697.5,760 ; 2820,600 2820,580 2850,550 2960,550 ; 2870,700 2870,680 2940,610 ; 2980,2010 2950,2010 2950,2070 ; 3850,1470 3850,1390 3830,1410 3870,1410 3852.5,1392.5 ; 40,1720 40,1740 20,1720 40,1720 ; 300,1480 660,1480 660,1340 240,1340 240,1540 300,1540 300,1480 ; 480,180 500,180 480,160 480,180 ; 550,490 840,490 840,590 480,590 480,430 550,430 550,490 ; 630,1300 630,1320 650,1300 630,1300 ; 710,840 690,860 730,860 710,840 ; 1470,1630 1470,1620 1480,1630 1470,1630 ; 1990,930 1990,910 2010,930 1990,930 ; 2940,610 2940,640 2910,610 2940,610 ; 2950,2070 2930,2050 2970,2050 2950,2070 ; 2960,550 2940,570 2940,530 2960,550 ; 240,1160 340,1160 340,1040 420,1040 420,1330 240,1330 240,1160 ; 650,720 720,720 720,610 780,610 780,840 660,840 650,840 650,720 ; 770,1480 930,1480 930,1710 770,1710 770,1480 ; 1500,1450 1640,1450 1640,1710 1500,1710 1500,1450 ; 1930,1080 1940,1070 1950,1080 1930,1080 ; 2030,930 2150,930 2150,1010 2030,1010 2030,930 ; 2150,870 2220,870 2220,960 2150,960 2150,870 ; 2240,790 2380,790 2380,930 2240,930 2240,790 ; 2250,1490 2390,1490 2390,1710 2250,1710 2250,1490 ; 2700,660 2810,660 2810,770 2700,770 2700,660 ; 2870,690 3230,690 3230,750 2870,750 2870,690 ; 2880,2070 2990,2070 2990,2500 2880,2500 2880,2070 ; 2980,1790 3080,1790 3080,2070 2980,2070 2980,1790 ; 3610,1470 3950,1470 3950,1530 3610,1530 3610,1470
  text "X" at 90,2600 h60
  text "Y" at 910,2600 h60
  text "Z" at 1650,2600 h60
  text "E" at 2410,2600 h60
  text "SV_NL_V1.3.1" at 3130,1960 h50
  text "E" at 2941.43,1740 h30
  text "X" at 740,1640 h30
  text "Y" at 1467.15,1640 h30
  text "Z" at 2220,1640 h30
  text "A" at 257.15,1490 h30
  text "3V3 IO CK G" at 3675.06,1480 h30
  text "Sovol" at 2630,1340 h200
  text "+   -" at 1939.03,870 h30
  text "K-FAN1" at 2176,804.54 h30 r270
  text "G V IN G OUT" at 2939.78,700 h30
  text "K-FAN2" at 2176,557.39 h30 r270
  text "A" at 507.15,440 h30
  text "N_LMT" at 2595,434.31 h25 r90
  text "+" at 607.15,430 h50
  text "-" at 797.15,430 h50
  text "LMT" at 2475,425.13 h25 r90
  text "+" at 492,413.42 h60 r270
  text "24V" at 506,342.27 h30 r270
  text "X-" at 2437.58,250 h30
  text "Y-" at 2617.58,250 h30
  text "Z-" at 2877.58,250 h30
  text "-" at 492,233.42 h60 r270
Silkscreen Bottom:
  lines w6: 0,180 470,180 470,570 0,570 ; 0,380 380,380 ; 580,20 580,420 1770,420 1770,20 ; 980,10 980,420 ; 1370,10 1370,420 ; 1800,10 1800,240 3720,240 3720,0 ; 1870,585 2170,585 ; 2190,10 2190,240 ; 2500,10 2500,230 ; 2810,10 2810,240 ; 3110,10 3110,240 ; 3420,10 3420,240 ; 1870,340 2170,340 2170,830 1870,830 1870,340
  text "K-FAN1" at 2350.54,670 h30
  text "B0BB0HB0" at 3890,470 h30 r270
  text "- FAN +" at 849.53,330 h30
  text "BED" at 1192.27,320 h30
  text "HEAT1" at 1604.4,320 h30
  text "-24V+" at 390,266 h50 r270
  text "V G S" at 2034.12,50 h30
  text "X-" at 2374.42,50 h30
  text "Y-" at 2674.42,50 h30
  text "Z-" at 2994.42,50 h30
  text "TB" at 3285.56,50 h30
  text "TH" at 3635.56,50 h30

## Text inside footprints (layer, text, board x,y; h text height)
U4: Solder Mask Top "K-FAN2" at 2353.39,480 h30